# Altium PCB PCB_CrossedHammerDesign.PcbDoc
Units mil, origin at the board's own origin, x right, y up, seen from the top; angles counter-clockwise.
Board outline 4843.33 x 4828.47 mil, 2 copper layers (Top Layer, Bottom Layer); 71 components, 83 nets, 284 pads, 93 vias.
Unrouted connection lines stored in the file: 7.
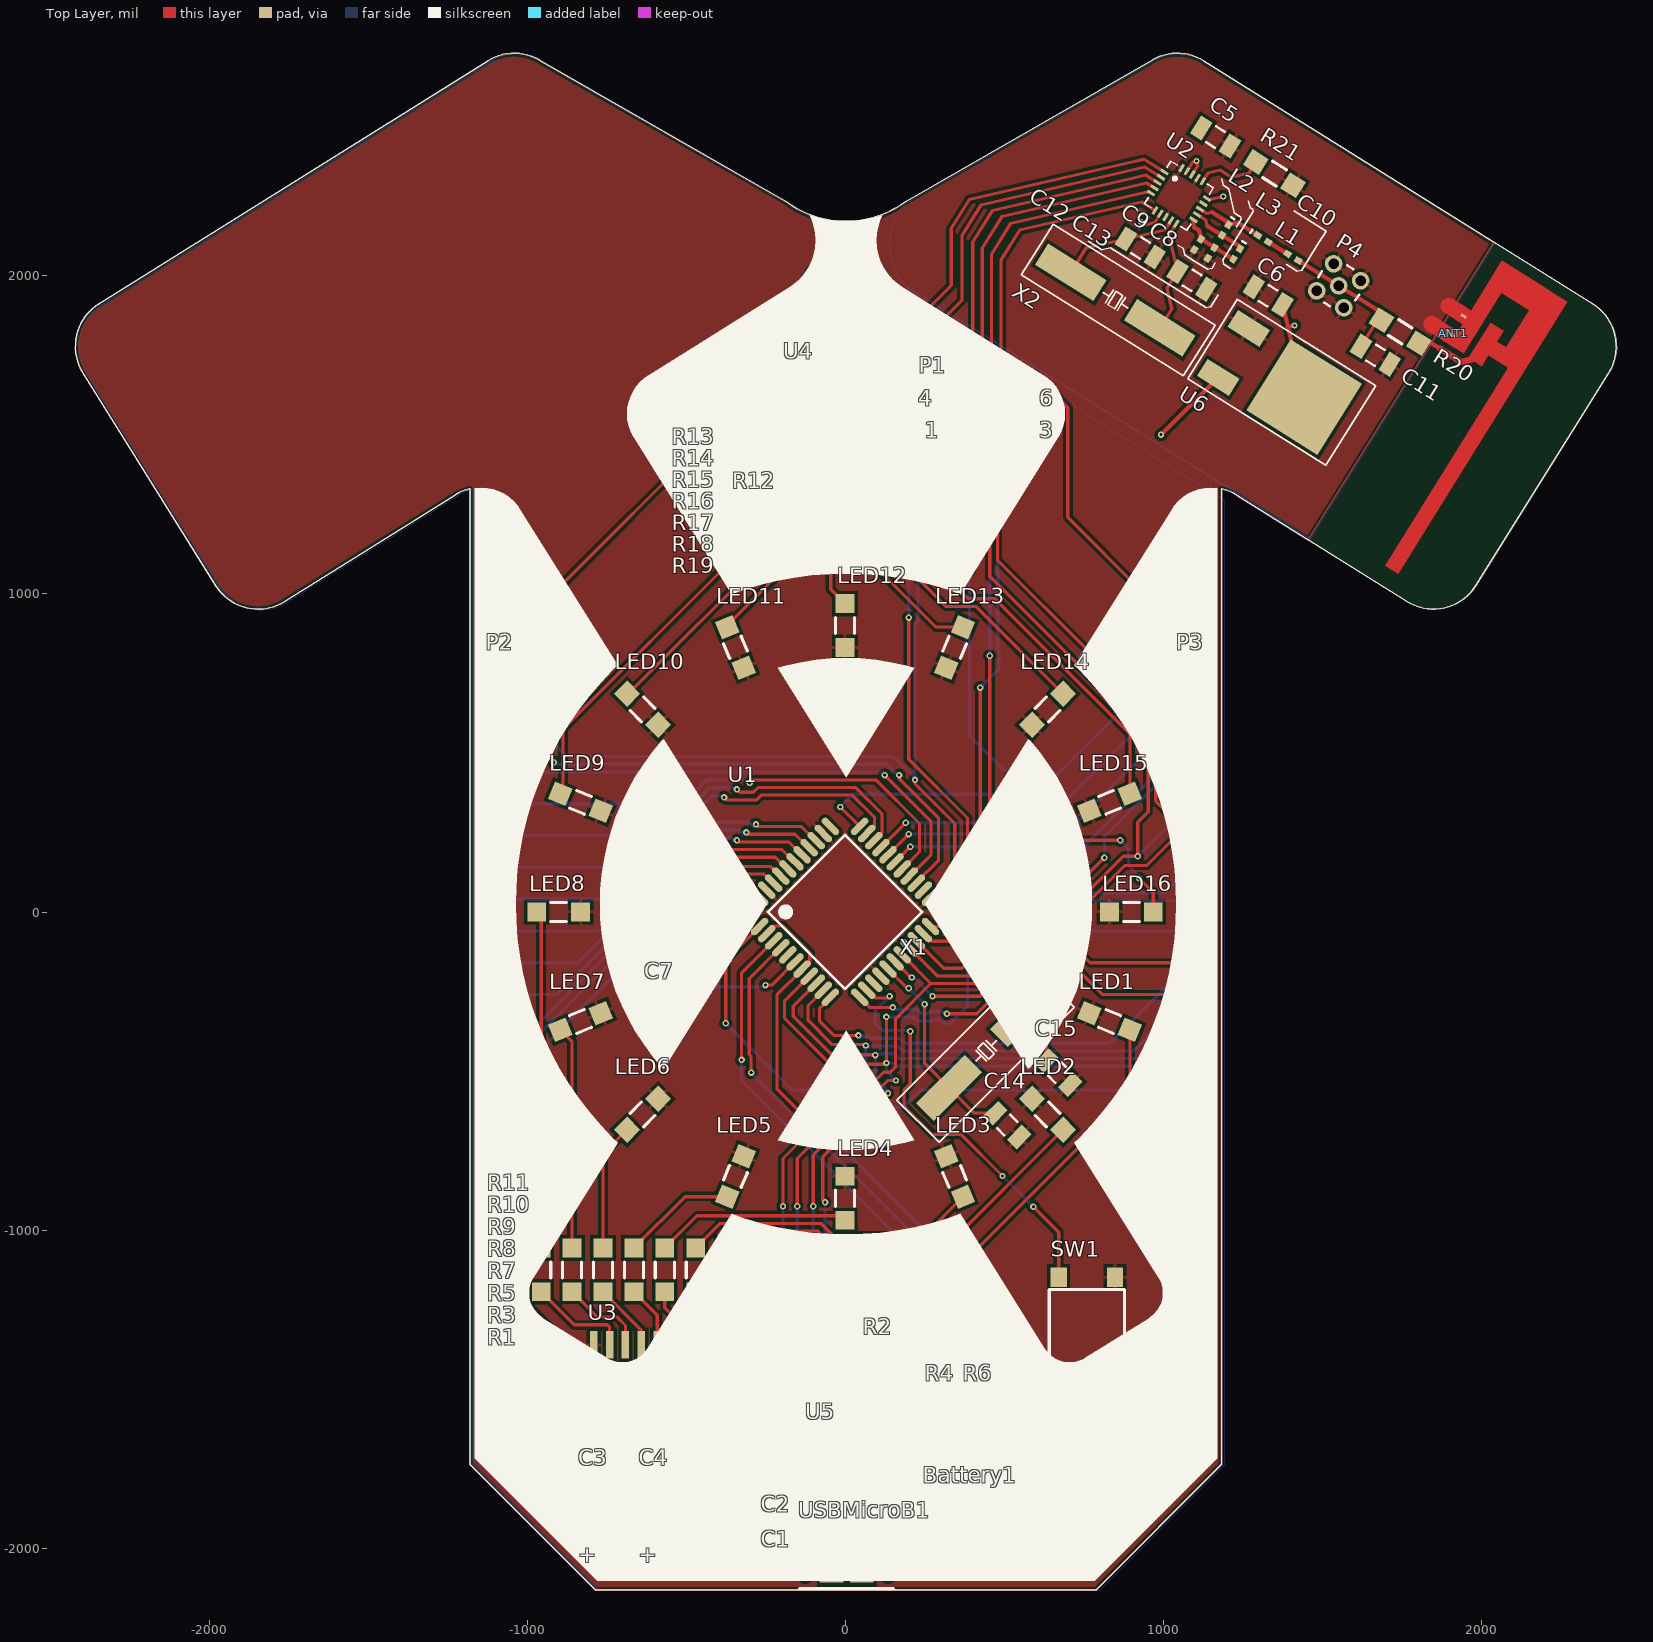
[diagram p0: Top Layer view]
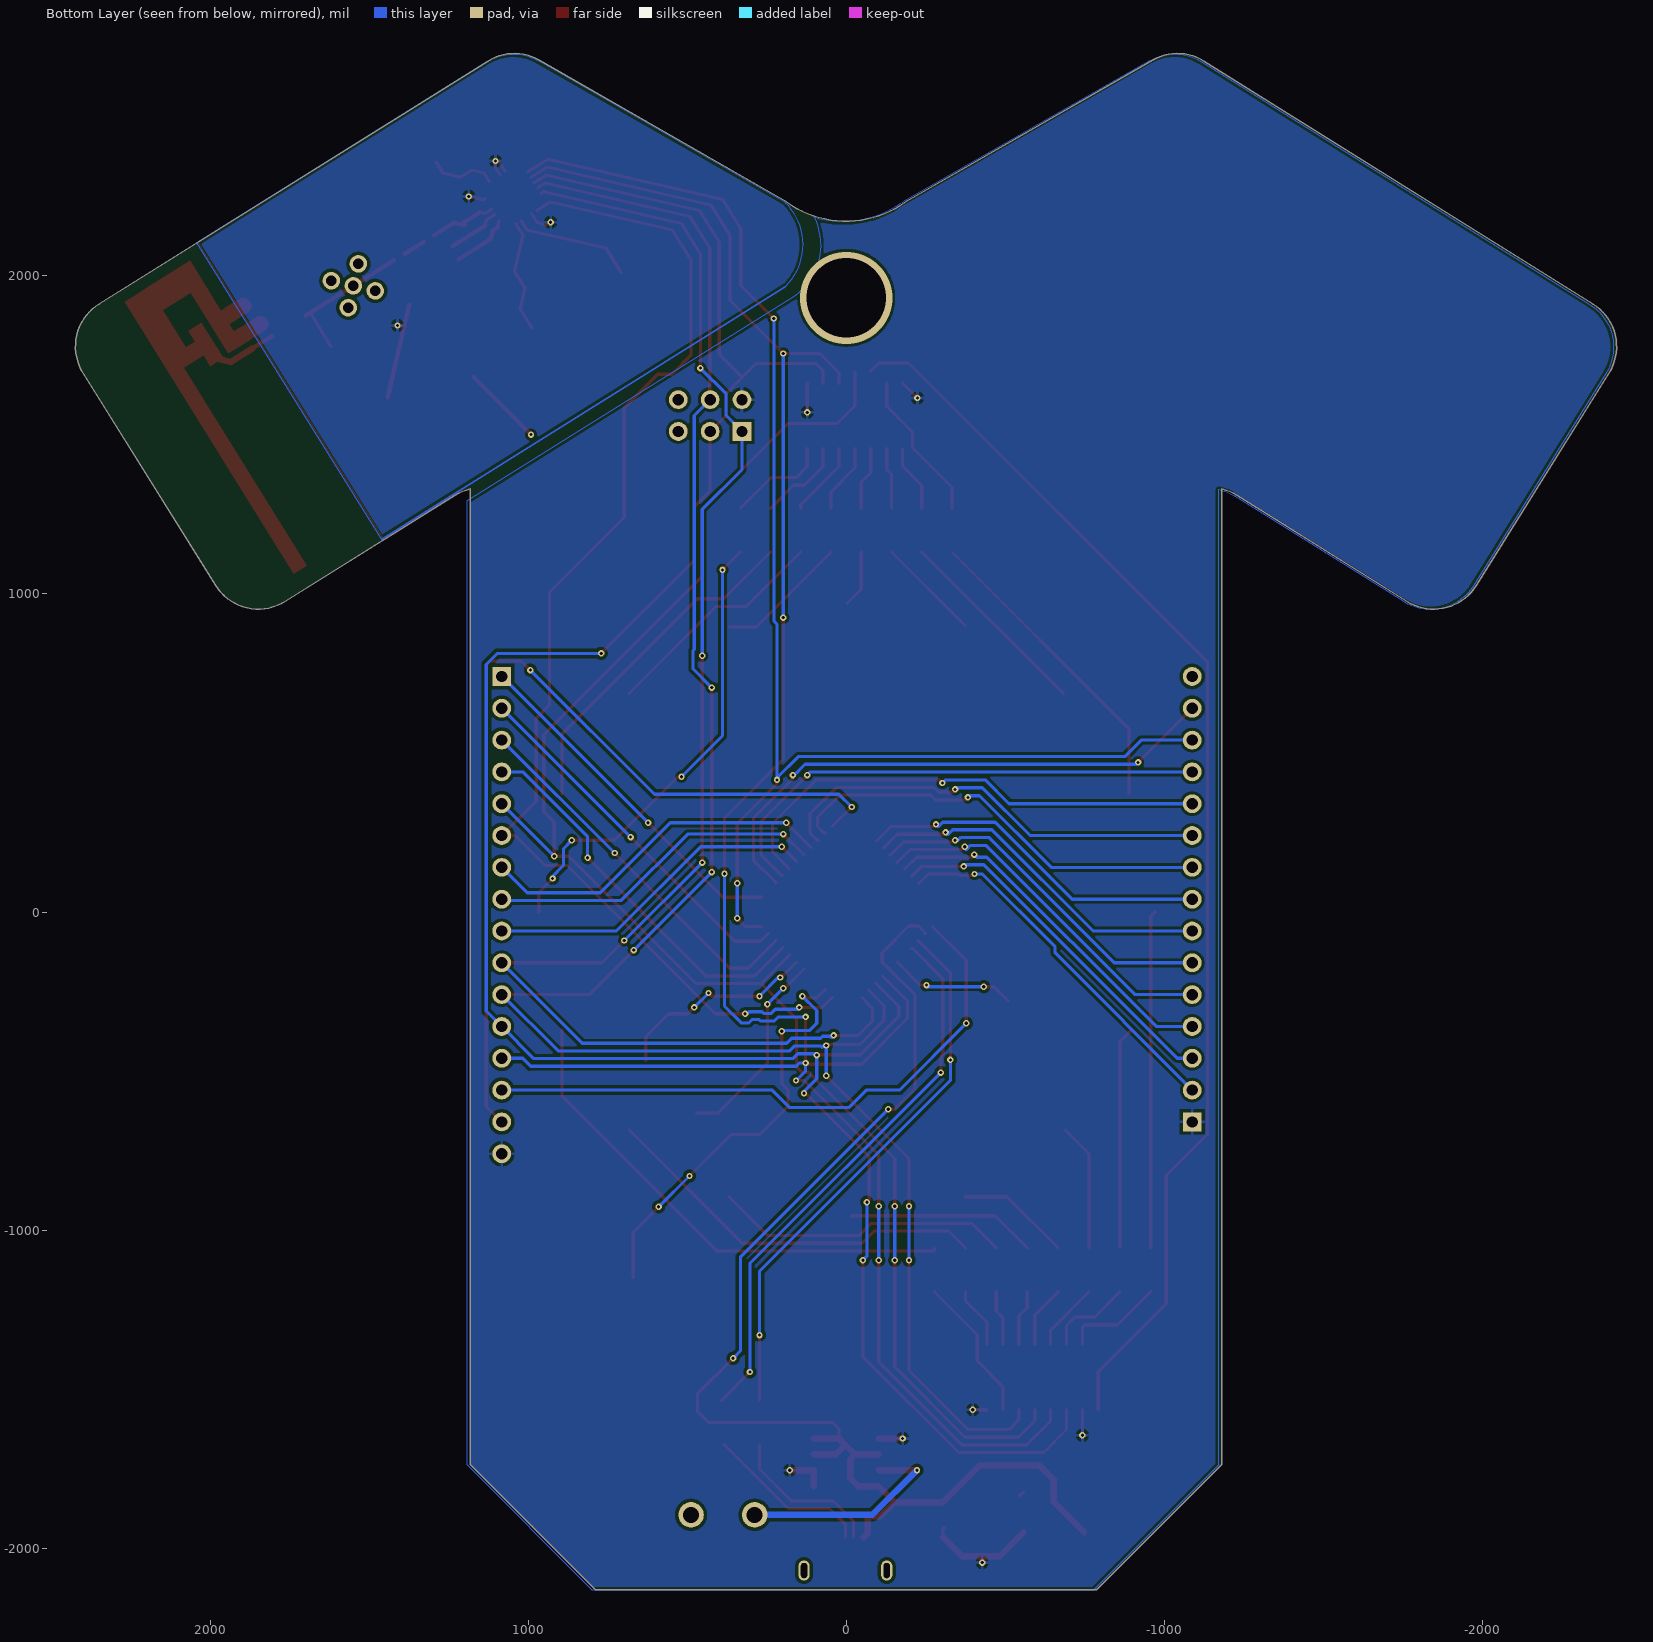
[diagram p1: Bottom Layer view, seen from below]

## Layer stack, top to bottom
Top Solder: solder mask 0.4, Solder Resist, Dk 3.5
Top Layer: signal copper 1.4
Dielectric 1: dielectric 12.6, FR-4, Dk 4.8
Bottom Layer: signal copper 1.4
Bottom Solder: solder mask 0.4, Solder Resist, Dk 3.5

## Board outline
-1978.56,1026.39 ccw(c-1845.01,1109.84) -1761.56,976.29 -1227.35,1310.09 cw(c-1143.9,1176.54) -1179.09,1330.04 -1179.09,-1736.05 -785.39,-2129.75 789.41,-2129.75 1183.11,-1736.05 1183.11,1330.04 cw(c1147.92,1176.54) 1231.37,1310.09 1765.58,976.29 ccw(c1849.03,1109.84) 1982.58,1026.39 2399.84,1694.14 ccw(c2266.29,1777.59) 2349.74,1911.14 1127.58,2674.83 ccw(c1044.13,2541.28) 965.81,2677.91 190.83,2233.69 cw(c2.01,2488.89) -186.81,2233.69 -961.8,2677.91 ccw(c-1040.11,2541.28) -1123.56,2674.83 -2345.72,1911.14 ccw(c-2262.27,1777.59) -2395.82,1694.14

## Design rules (kind name [scope] priority, off if disabled: settings)
Clearance [All] p1: gap=10
Clearance Clearance_Silk [(IsFill AND OnLayer('Top Overlay')) vs IsPad] p2: gap=10
PolygonConnect [All] p1: connectstyle=Relief reliefconductorwidth=10 reliefentries=4 polygonreliefangle="90 Angle" airgapwidth=10
RoomDefinition MainBoard [InComponentClass('MainBoard')] p1: confinementstyle=ConfineIn formatcopy=TRUE lockcomponents=FALSE outline 4130,-3385 8860,-3385 8860,-1665 4130,-1665
RoutingVias [All] p1: holewidth=10 width=20 viastyle="Through Hole" minholewidth=10 minwidth=20 maxholewidth=10 maxwidth=20
SolderMaskExpansion [All] p1: expansion=4
UnpouredPolygon [All] p1: allowunpoured=FALSE
Width [All] p1: maxlimit=59.06 minlimit=10 preferedwidth=10
29 further rules are at their usual default settings.

## Components (designator, comment, footprint, x,y, rotation, side; value= is the part's Value field where it differs from the comment)
ANT1 "INV_F_ANTENNA" INV_F_PCB_ANTENNA 2065.31,2052.29 r238 top
Battery1 "PowerPins" PowerPins_PCB 388.97,-1894.19 r0 top
C1 "Cap Semi" C1206 -356.03,-1964.19 r0 top
C2 "Cap Semi" C1206 -356.03,-1854.19 r0 top
C3 "Electrolytic Capacitor" sheityCapPackage -746.03,-1934.19 r0 top
C4 "Electrolytic Capacitor" sheityCapPackage -556.03,-1934.19 r0 top
C5 "Cap Semi" C1206 1163.7,2436.13 r148 top
C6 "Cap Semi" C1206 1328.48,1937.24 r328 top
C7 "Cap Semi" C1206 -561.03,-279.19 r180 top
C8 "Cap Semi" 0402 1149.25,2071.84 r58 top
C9 "Cap Semi" 0402 1106.85,2098.33 r58 top
C10 "Cap Semi" 0402 1406.3,2058.61 r148 top
C11 "Cap Semi" C1206 1665.58,1750.18 r328 top
C12 "Cap Semi" C1206 927.26,2087.73 r148 top
C13 "Cap Semi" C1206 1088.97,1985.81 r148 top
C14 "Cap Semi" C1206 508.97,-669.19 r315 top
C15 "Cap Semi" C1206 668.97,-504.19 r315 top
L1 "Inductor" 0402-A 1313.01,2116.9 r328 top
L2 "Inductor" 0402-A 1194.29,2143.92 r238 top
L3 "Inductor" 0402-A 1229.81,2068.66 r238 top
LED1 "LED_Green_1206Package" 1206Package_PCB 830.46,-343.61 r157.5 top
LED2 "LED_Green_1206Package" 1206Package_PCB 635.37,-635.59 r135 top
LED3 "LED_Green_1206Package" 1206Package_PCB 343.39,-830.68 r112.5 top
LED4 "LED_Green_1206Package" 1206Package_PCB -1.03,-899.19 r90 top
LED5 "LED_Green_1206Package" 1206Package_PCB -345.44,-830.68 r67.5 top
LED6 "LED_Green_1206Package" 1206Package_PCB -637.42,-635.59 r45 top
LED7 "LED_Green_1206Package" 1206Package_PCB -832.52,-343.61 r22.5 top
LED8 "LED_Green_1206Package" 1206Package_PCB -901.03,0.81 r0 top
LED9 "LED_Green_1206Package" 1206Package_PCB -832.52,345.22 r337.5 top
LED10 "LED_Green_1206Package" 1206Package_PCB -637.42,637.21 r315 top
LED11 "LED_Green_1206Package" 1206Package_PCB -345.44,832.3 r292.5 top
LED12 "LED_Green_1206Package" 1206Package_PCB -1.03,900.81 r270 top
LED13 "LED_Green_1206Package" 1206Package_PCB 343.39,832.3 r247.5 top
LED14 "LED_Green_1206Package" 1206Package_PCB 635.37,637.21 r225 top
LED15 "LED_Green_1206Package" 1206Package_PCB 830.46,345.22 r202.5 top
LED16 "LED_Green_1206Package" 1206Package_PCB 898.97,0.81 r180 top
P1 "Header 3X2A" HDR2X3_CEN 328.97,1510.81 r0 top
P2 "Header 15" HDR1X15 -1086.03,-659.19 r90 top
P3 "Header 16" HDR1X16 1083.97,740.81 r270 top
P4 "COAX-M" MMCX2.54-V5 1550.47,1968.52 r328 top
R1 "Resistor_1206Package" 1206Package_PCB -276.03,-1124.19 r90 top
R2 "Resistor_1206Package" 1206Package_PCB 78.97,-1459.19 r270 top
R3 "Resistor_1206Package" 1206Package_PCB -373.17,-1124.19 r90 top
R4 "Resistor_1206Package" 1206Package_PCB 273.97,-1604.19 r270 top
R5 "Resistor_1206Package" 1206Package_PCB -470.31,-1124.19 r90 top
R6 "Resistor_1206Package" 1206Package_PCB 393.97,-1604.19 r270 top
R7 "Resistor_1206Package" 1206Package_PCB -567.46,-1124.19 r90 top
R8 "Resistor_1206Package" 1206Package_PCB -664.6,-1124.19 r90 top
R9 "Resistor_1206Package" 1206Package_PCB -761.74,-1124.19 r90 top
R10 "Resistor_1206Package" 1206Package_PCB -858.89,-1124.19 r90 top
R11 "Resistor_1206Package" 1206Package_PCB -956.03,-1124.19 r90 top
R12 "Resistor_1206Package" 1206Package_PCB -331.03,1200.81 r270 top
R13 "Resistor_1206Package" 1206Package_PCB -236.03,1200.81 r270 top
R14 "Resistor_1206Package" 1206Package_PCB -141.03,1200.81 r270 top
R15 "Resistor_1206Package" 1206Package_PCB -46.03,1200.81 r270 top
R16 "Resistor_1206Package" 1206Package_PCB 48.97,1200.81 r270 top
R17 "Resistor_1206Package" 1206Package_PCB 143.97,1200.81 r270 top
R18 "Resistor_1206Package" 1206Package_PCB 238.97,1200.81 r270 top
R19 "Resistor_1206Package" 1206Package_PCB 333.97,1200.81 r270 top
R20 "Resistor_1206Package" 1206Package_PCB 1743.51,1824.15 r328 top
R21 "Resistor_1206Package" 1206Package_PCB 1348.7,2321.13 r328 top
SW1 "PushButton" TactileSwitchPCB 758.97,-1304.19 r90 top
U1 "ATmega32U4-AU" 44ML_N -1.03,0.81 r45 top
U2 "nRF24L01+" 20-VFQFN 973.28,2205.38 r328 top
U3 "8BitShiftReg" 16-SOIC -441.03,-1359.19 r270 top
U4 "8BitShiftReg" 16-SOIC -176.03,1457.5 r90 top
U5 "DualNP-ChFET" 8-SOIC -101.03,-1804.19 r0 top
U6 "LD1117DT33TR" DPAK 1267.89,1834.26 r238 top
USBMicroB1 "Micro USB Receptacle Type B" USBMicroB_PCB 3.97,-2069.19 r0 top
X1 "HC-49S" HC-49S 558.97,-319.19 r225 top
X2 "HC-49S" HC-49S 708.97,2010.81 r328 top

## Footprints (in the part's own frame and the unit in brackets; to place one, negate y for a bottom-side part, rotate by r counter-clockwise, add the part's x,y. Pads: shape width x height; smd on the part's side, far side on the other; paste and mask are expansions set on the pad)
8-SOIC [mm]
  rect 2.2x0.6 smd: 1(0,3.81) 2(0,2.54) 3(0,1.27) 4(0,0) 5(5.2,0) 6(5.2,1.27) 7(5.2,2.54) 8(5.2,3.81)
  silkscreen extent 1.4,-0.63 3.81,4.45
16-SOIC [mm]
  rect 2.2x0.6 smd: 1(0,0) 2(0,-1.27) 3(0,-2.54) 4(0,-3.81) 5(0,-5.08) 6(0,-6.35) 7(0,-7.62) 8(0,-8.89) 9(5.2,-8.89) 10(5.2,-7.62) 11(5.2,-6.35) 12(5.2,-5.08) 13(5.2,-3.81) 14(5.2,-2.54) 15(5.2,-1.27) 16(5.2,0)
  silkscreen extent 1.94,-9.53 3.27,0.64
20-VFQFN [mm] "The package"
  rect 0.7x0.25 smd: 1(-1,3) 2(-1,2.5) 3(-1,2) 4(-1,1.5) 5(-1,1) 11(3,1) 12(3,1.5) 13(3,2) 14(3,2.5) 15(3,3)
  rect 0.25x0.7 smd: 6(0,0) 7(0.5,0) 8(1,0) 9(1.5,0) 10(2,0) 16(2,4) 17(1.5,4) 18(1,4) 19(0.5,4) 20(0,4)
  silkscreen extent -1,0 3,4
44ML_N [mm] "Thin QFP, 44-Leads, Body 10x10mm, Pitch 0.8mm, IPC Medium Density"
  oval 1.75x0.55 smd: 1(-5.65,4) 2(-5.65,3.2) 3(-5.65,2.4) 4(-5.65,1.6) 5(-5.65,0.8) 6(-5.65,0) 7(-5.65,-0.8) 8(-5.65,-1.6) 9(-5.65,-2.4) 10(-5.65,-3.2) 11(-5.65,-4) 23(5.65,-4) 24(5.65,-3.2) 25(5.65,-2.4) 26(5.65,-1.6) 27(5.65,-0.8) 28(5.65,0) 29(5.65,0.8) 30(5.65,1.6) 31(5.65,2.4) 32(5.65,3.2) 33(5.65,4)
  oval 0.55x1.75 smd: 12(-4,-5.65) 13(-3.2,-5.65) 14(-2.4,-5.65) 15(-1.6,-5.65) 16(-0.8,-5.65) 17(0,-5.65) 18(0.8,-5.65) 19(1.6,-5.65) 20(2.4,-5.65) 21(3.2,-5.65) 22(4,-5.65) 34(4,5.65) 35(3.2,5.65) 36(2.4,5.65) 37(1.6,5.65) 38(0.8,5.65) 39(0,5.65) 40(-0.8,5.65) 41(-1.6,5.65) 42(-2.4,5.65) 43(-3.2,5.65) 44(-4,5.65)
  silkscreen extent -5.77,-4.35 4.35,4.95, body extent -5,-5 5,5, height 1.2
0402 [mm] "Chip Capacitor, Body 1.0x0.5mm, IPC High Density"
  rect 0.6x0.5 smd: 1(-0.5,0) 2(0.5,0)
  body extent -0.55,-0.3 0.55,0.3, height 1.3
0402-A [mm] "Chip Inductor, Body 1.0x0.5mm, IPC High Density"
  rect 0.6x0.5 smd: 1(-0.5,0) 2(0.5,0)
  silkscreen extent -1.1,-0.15 -1.1,0.15, body extent -0.55,-0.3 0.55,0.3, height 0.55
1206Package_PCB [mm]
  rect 1.5x1.5 smd: 1(-1.75,0) 2(1.75,0)
  silkscreen extent -0.64,-0.76 0.64,0.76
C1206 [mm] "Chip Capacitor, Body 3.2x1.6mm, IPC High Density"
  rect 1.1x1.7 smd: 1(-1.35,0) 2(1.35,0)
  silkscreen extent -0.4,-0.75 0.4,0.75, body extent -1.7,-0.9 1.7,0.9, height 1.3
DPAK [mm]
  rect 1.6x3 smd: 1(0,0) 3(4.6,0)
  rect 6.7x6.7 smd: 2(2.3,6.65)
  silkscreen extent -1.5,-2 6,11
HC-49S [mm]
  rect 5.5x2 smd: 1(0,0) 2(8.375,0)
  silkscreen extent -3.25,-2.25 12,2.5
HDR1X15 [mm] "Connector; Header; 15 Position"
  rect 1.5x1.5 hole 0.9: 1(0,0)
  round 1.5 hole 0.9: 2(2.54,0) 3(5.08,0) 4(7.62,0) 5(10.16,0) 6(12.7,0) 7(15.24,0) 8(17.78,0) 9(20.32,0) 10(22.86,0) 11(25.4,0) 12(27.94,0) 13(30.48,0) 14(33.02,0) 15(35.56,0)
  silkscreen extent 36.83,-1.27 36.83,1.27
HDR1X16 [mm] "Connector; Header; 16 Position"
  rect 1.5x1.5 hole 0.9: 1(0,0)
  round 1.5 hole 0.9: 2(2.54,0) 3(5.08,0) 4(7.62,0) 5(10.16,0) 6(12.7,0) 7(15.24,0) 8(17.78,0) 9(20.32,0) 10(22.86,0) 11(25.4,0) 12(27.94,0) 13(30.48,0) 14(33.02,0) 15(35.56,0) 16(38.1,0)
  silkscreen extent -1.27,-1.27 39.37,1.27
HDR2X3_CEN [mm] "Connector; Header; 3x2 Position"
  rect 1.5x1.5 hole 0.9: 1(0,0)
  round 1.5 hole 0.9: 2(2.54,0) 3(5.08,0) 4(0,2.54) 5(2.54,2.54) 6(5.08,2.54)
  silkscreen extent -1.27,-1.27 6.35,3.81
INV_F_PCB_ANTENNA [mm]
  rect 0.2x0.5 smd: 1(5.5,-0.2) 2(7.25,-0.2) 3(8.696,-0.2)
  Top Layer region: 0.127,0.043 0.127,0.04 0.129,0.038 0.131,0.037 0.133,0.036 0.133,0.036 4.81,0.047 4.81,-0.598 4.811,-0.6 4.812,-0.602 4.814,-0.604 4.817,-0.604 4.817,-0.604 6.077,-0.601 6.081,-0.6 6.083,-0.598 6.084,-0.595 6.084,-0.595 6.084,0.05 6.775,0.052 6.775,-0.593 6.776,-0.596 6.777,-0.598 6.779,-0.599 6.782,-0.6 6.782,-0.6 8.016,-0.597 8.02,-0.596 8.022,-0.593 8.023,-0.59 8.023,-0.59 8.023,-0.033 8.023,1.343 8.022,1.346 8.021,1.348 8.019,1.35 8.016,1.35 8.016,1.35 2.32,1.337 2.32,3.977 5.81,3.985 5.81,3.109 4.817,3.107 4.814,3.106 4.811,3.103 4.81,3.1 4.81,3.1 4.81,1.897 4.811,1.895 4.812,1.893 4.814,1.891 4.817,1.891 4.817,1.891 8.014,1.898 8.459,1.456 8.459,-0.589 8.46,-0.592 8.461,-0.594 8.463,-0.595 8.466,-0.596 8.466,-0.596 8.926,-0.595 8.929,-0.594 8.932,-0.591 8.933,-0.588 8.933,-0.588 8.933,1.649 8.932,1.652 8.931,1.654 8.931,1.654 8.931,1.654 8.931,1.654 8.931,1.654 8.931,1.654 8.931,1.654 8.118,2.46 8.118,3.108 8.118,3.11 8.116,3.112 8.114,3.114 8.112,3.114 8.112,3.114 7.119,3.112 7.119,3.995 7.119,4.982 25.708,5.026 25.711,5.027 25.713,5.029 25.714,5.032 25.714,5.032 25.714,6.235 25.714,6.238 25.712,6.24 25.71,6.241 25.708,6.242 25.708,6.242 0.134,6.182 0.13,6.181 0.128,6.179 0.127,6.176 0.127,6.176 0.127,4.973 0.127,3.979 0.127,1.325
MMCX2.54-V5 [mm] "Connector; RF Coaxial, MMCX, Thru-Hole; 5 Position; Vertical"
  round 1.4 hole 0.85: 1(0,0) 2(-1.27,-1.27) 3(1.27,-1.27) 4(1.27,1.27) 5(-1.27,1.27)
  silkscreen extent -1.75,-1.75 1.75,1.75
PowerPins_PCB [mil]
  round 80 hole 50: 1(-100,0) 2(100,0)
  silkscreen extent -150,-50 150,50
sheityCapPackage [mm] "This is jank"
  rect 1.3x2.5 smd: 1(0,-0.375) 2(0,2.875)
TactileSwitchPCB [mm]
  rect 1.55x1.3 smd: 1(-3.975,2.25) 2(3.975,2.25) 3(-3.975,-2.25) 4(3.975,-2.25)
  silkscreen extent -3,-3 3,3
USBMicroB_PCB [mm]
  rect 0.4x1.35 smd: 1(-1.3,2.667) 2(-0.65,2.667) 3(0,2.675) 4(0.65,2.667) 5(1.3,2.667)
  oval 0.9x1.6 hole 0.5 slot 1.2 at 90 deg: CASE(-3.3,0) CASE(3.3,0)
  rect 1.6x1.4 smd: CASE(-3.2,2.45) CASE(3.2,2.45)
  rect 1.9x1.9 smd: CASE(-1.2,0) CASE(1.2,0)
  silkscreen extent -3.75,-1.45 3.75,-1.45

## Part data
ANT1: library part INV_V_ANTENNA
C1 C2 C5 C6 C7 C8 C9 C10 C11 C12 C13 C14 C15: "Capacitor (Semiconductor SIM Model)"
C3 C4: "asdf"
LED1 LED2 LED3 LED4 LED5 LED6 LED7 LED8 LED9 LED10 LED11 LED12 LED13 LED14 LED15 LED16: "Green LED"
P1: "Header, 3-Pin, Dual row"
P2: "Header, 15-Pin"
P3: "Header, 16-Pin"
P4: "RF Coaxial PCB Connector, MMCX; Thru-Hole, Vertical Mount Plug,  50 Ohm Impedance"
R1 R2 R3 R4 R5 R6 R7 R8 R9 R10 R11 R12 R13 R14 R15 R16 R17 R18 R19 R20 R21: "Resistor 1206"
SW1: library part TactileButton, "Normally open push button."
U1: "8-bit AVR Microcontroller, 2.7-5.5V, 32KB Flash, 2.5KB EEPROM, 1KB SRAM, USB Controller, 44-pin TQFP, Industrial Grade (-40°C to 85°C)"
U2: "2.4GHz RF Transceiver"
U3 U4: library part 8BitShiftRegister
U5: library part "Dual N & P-Channel MOSFET"
USBMicroB1: library part USBMicroB

## Free pads (board coordinates)
  rect 7.87x19.68 smd: 0(48.97,1300)

## Via types
v1: diameter 20, hole 10, Top Layer to Bottom Layer, 92 vias
v2: diameter 289.37, hole 250, Top Layer to Bottom Layer, 1 vias

## Nets (pads, with @x,y where several pads share a name; then routed paths per layer and width w, separated by ;. In a path a pad name is that pad's centre, name@x,y a point inside that pad or via, vN(x,y) a via of type N, cw(c..) or ccw(c..) an arc to the next point about the centre after c; other vN are vias at no path point)
3V3: C6.2 U2.7 U2.15 U2.18 U2.19 U6.2 | length 544.8
  Top Layer w10: v1(930.43,2168.29) 943.15,2160.34 972.59,2167.13 U2.7 ; U2.19 1091.82,2357.94 v1(1103.72,2360.69) 1107.24,2345.47 U2.18 ; U2.15 1142.38,2238.99 v1(1187.47,2249.4)
  Top Layer w14: C6.2@1375.12,1908.1 1391.03,1839.2 ; v1(1411.7,1843.97) 1391.03,1839.2 ; U6.2 1391.03,1839.2
ANT1: L2.2 L3.1 U2.12 | length 172
  Top Layer w10: U2.12 1132.58,2175.47 1136.95,2156.54
  Top Layer w14: 1136.95,2156.54 L2.2 L3.1@1238.45,2093.12
ANT2: L1.1 L2.1 U2.13 | length 213.4
  Top Layer w10: U2.13 1136.9,2195.98 1152.42,2199.57 ; L2.1@1196.53,2158.72 L2.1
  Top Layer w14: 1152.42,2199.57 L2.1@1203.03,2167.94 ; L2.1 1232.72,2167.08 L1.1
BATT: Battery1.1 U5.3 | length 688
  Top Layer w20: v1(-221.03,-1754.19) U5.3
  Bottom Layer w20: v1(-221.03,-1754.19) -81.03,-1894.19 Battery1.1
D+: R6.1 U1.4 | length 1753.1
  Top Layer w10: v1(-296.03,-504.19) -297.03,-503.19 -297.03,-452.18 -302.03,-447.18 -302.03,-208.75 -207.58,-114.3 U1.4@-202.86,-114.3 ; v1(303.97,-1445.25) R6.1@393.97,-1535.25
  Bottom Layer w10: v1(-296.03,-504.19) 303.97,-1104.19 v1(303.97,-1445.25)
D-: R4.1 U1.3 | length 1735.9
  Top Layer w10: v1(-326.03,-464.19) -326.03,-190.56 U1.3 ; R4.1 v1(273.97,-1329.19)
  Bottom Layer w10: v1(-326.03,-464.19) -326.03,-529.19 273.97,-1129.19 v1(273.97,-1329.19)
GND: ANT1.1 ANT1.2 Battery1.2 C1.1 C2.1 C3.2 C4.2 C5.1 C6.1 C7.2 C8.1 C9.1 C11.2 C12.1 C13.1 C14.2 C15.2 LED1.2 LED2.2 LED3.2 LED4.2 LED5.2 LED6.2 LED7.2 LED8.2 LED9.2 LED10.2 LED11.2 LED12.2 LED13.2 LED14.2 LED15.2 LED16.2 P1.6 P2.15 P3.1 P4.2 P4.3 P4.4 P4.5 R2.1 R21.2 SW1.3 SW1.4 U1.5 U1.15 U1.23 U1.35 U1.43 U2.8 U2.14 U2.17 U2.20 U3.8 U4.8 U6.1 USBMicroB1.5 | length 1231.1
  Top Layer w10: C4.2 C4.2@-542.84,-1834.19 ; U1.23 389.91,46.74 v1(623.97,280.81)
  Top Layer w51.18: 1841.91,1848.26 1893.29,1816.16 ; 1896.75,1904.79 ANT1.1@1937.49,1879.34
  Bottom Layer w10: v1(623.97,280.81) P3.1
MISO: P1.1 P3.10 U1.11 U2.5 | length 4736.8
  Top Layer w10: U1.11 -81.03,-301.9 -81.03,-342.37 -36.21,-387.19 v1(40.97,-387.19) ; v1(453.97,155.81) v1(453.97,805.81) ; v1(459.79,1709.99) 459.79,2068.85 519.3,2164.08 913.99,2255.2 953.31,2264.28 U2.5 ; v1(698.97,-89.19) 768.97,-159.19 P3.10
  Bottom Layer w10: v1(40.97,-387.19) 47.97,-394.18 51.96,-390.19 75.98,-390.19 81.98,-396.19 172.79,-396.19 188.79,-412.19 830.97,-412.19 P3.10 ; v1(453.97,155.81) v1(698.97,-89.19) ; v1(453.97,805.81) 453.97,1265.81 328.97,1390.81 P1.1 378.97,1560.81 378.97,1629.44 459.52,1709.99 v1(459.79,1709.99)
MOSI: P1.5 P3.11 U1.10 U2.4 U3.14 | length 6471
  Top Layer w10: U3.14 -541.03,-1595.9 -510.71,-1626.22 -382.05,-1626.22 -196.03,-1440.2 v1(-196.03,-1094.19) ; v1(-196.03,-924.19) -196.03,-774.19 v1(63.97,-514.19) ; U1.10 -117.09,-293.42 -117.09,-340.25 -41.15,-416.19 60.97,-416.19 v1(63.97,-419.19) ; v1(423.97,125.81) v1(423.97,705.81) ; P1.5 430.11,1611.95 430.11,2087.4 492.27,2186.87 907.63,2282.76 946.52,2291.74 U2.4 ; v1(668.97,-119.19) 808.97,-259.19 P3.11
  Bottom Layer w10: v1(-196.03,-1094.19) v1(-196.03,-924.19) ; v1(63.97,-514.19) v1(63.97,-419.19) 62.97,-420.19 72.04,-420.19 77,-425.15 81.96,-420.19 162.85,-420.19 178.85,-436.19 906.97,-436.19 P3.11 ; v1(423.97,125.81) v1(668.97,-119.19) ; v1(423.97,705.81) 482.97,764.81 482.97,821.82 478.97,825.82 478.97,1560.81 P1.5
NetANT1_3: ANT1.3 R20.2 | length 74.4
  Top Layer w14.5: R20.2@1804.85,1810.25 1867.92,1770.84
NetC7_1: C7.1 U1.6 | length 403.3
  Top Layer w10: C7.1 -462.88,-234.19 v1(-431.03,-234.19) ; v1(-251.03,-229.19) -231.03,-229.19 U1.6
  Bottom Layer w10: v1(-431.03,-234.19) -251.03,-234.19 v1(-251.03,-229.19)
NetC10_1: C10.1 C11.1 P4.1 R20.1 | length 450.2
  Top Layer w10: C11.1 R20.1@1686.12,1883.36
  Top Layer w14: C10.1 P4.1 R20.1@1699.81,1875.2
NetC10_2: C10.2 L1.2 | length 70.6
  Top Layer w14: L1.2 C10.2
NetC12_2: C12.2 U2.9 X2.1 | length 379.7
  Top Layer w10: X2.1 756.5,2086.87 C12.2 1004.66,2144.17 U2.9
NetC13_2: C13.2 U2.10 X2.2 | length 358.5
  Top Layer w10: X2.2 1025.97,1895.9 1010.9,1961.17 C13.2 1017.72,2127.38 ; 1017.63,2127.77 U2.10
NetC14_1: C14.1 U1.16 X1.2 | length 634.1
  Top Layer w10: U1.16 194.43,-239.19 v1(198.97,-239.19) ; v1(248.97,-289.19) 248.97,-475.49 X1.2 405.09,-631.61 C14.1
  Bottom Layer w10: v1(198.97,-239.19) v1(248.97,-289.19)
NetC15_1: C15.1 U1.17 X1.1 | length 655.8
  Top Layer w10: U1.17 204.97,-205.19 v1(208.5,-205.19) ; v1(273.97,-264.19) 423.97,-264.19 v1(433.97,-254.19) ; v1(478.97,-299.19) 498.97,-319.19 X1.1 631.39,-391.61 C15.1
  Bottom Layer w10: v1(208.5,-205.19) 214.97,-205.19 v1(273.97,-264.19) ; v1(433.97,-254.19) v1(478.97,-299.19)
NetLED1_1: LED1.1 R1.2 | length 1589.7
  Top Layer w10: R1.2 -276.03,-1064.62 408.55,-1064.62 894.12,-579.05 LED1.1
NetLED2_1: LED2.1 R3.2 | length 1242.8
  Top Layer w10: R3.2 -320.07,-1002.19 -86.79,-1002.19 -48.37,-1040.62 327.77,-1040.62 LED2.1
NetLED3_1: LED3.1 R5.2 | length 938.6
  Top Layer w10: R5.2 -393.21,-978.19 -76.85,-978.19 -38.43,-1016.62 247.47,-1016.62 LED3.1
NetLED4_1: LED4.1 R7.2 | length 594.4
  Top Layer w10: R7.2 -466.36,-954.19 LED4.1@-14.93,-954.19
NetLED5_1: LED5.1 R8.2 | length 359.5
  Top Layer w10: R8.2 -503.64,-894.34 LED5.1
NetLED6_1: LED6.1 R9.2 | length 402.3
  Top Layer w10: R9.2 -761.74,-759.9 LED6.1
NetLED7_1: LED7.1 R10.2 | length 700.8
  Top Layer w10: LED7.1 -858.89,-407.26 R10.2
NetLED8_1: LED8.1 R11.2 | length 1061.9
  Top Layer w10: LED8.1 -956.03,-13.09 R11.2
NetLED9_1: LED9.1 R12.2 | length 990.6
  Top Layer w10: LED9.1@-887.03,371.59 -887.03,575.91 R12.2
NetLED10_1: LED10.1 R13.2 | length 630.7
  Top Layer w10: LED10.1@-682.02,685.92 R13.2
NetLED11_1: LED11.1 R14.2 | length 326.4
  Top Layer w10: LED11.1@-371.81,901.13 R14.2
NetLED12_1: LED12.1 R15.2 | length 180.8
  Top Layer w10: R15.2 -46.03,1014.71 LED12.1
NetLED13_1: LED13.1 R16.2 | length 418.5
  Top Layer w10: R16.2 284.93,895.95 LED13.1
NetLED14_1: LED14.1 R17.2 | length 724.8
  Top Layer w10: R17.2 315.07,960.81 409.2,960.81 LED14.1
NetLED15_1: LED15.1 R18.2 | length 1080.8
  Top Layer w10: R18.2 386.07,984.81 469.97,984.81 894.12,560.66 LED15.1
NetLED16_1: LED16.1 R19.2 | length 1478.6
  Top Layer w10: R19.2 v1(390.07,1075.81) ; v1(518.97,425.81) 529.98,425.81 729.98,225.81 v1(863.97,225.81) ; v1(923.97,105.81) 967.87,61.91 LED16.1
  Bottom Layer w10: v1(390.07,1075.81) 390.07,554.71 v1(518.97,425.81) ; v1(863.97,225.81) 889.97,199.81 889.97,146.81 923.97,112.81 v1(923.97,105.81)
NetP2_2: P2.2 U1.42 | length 1169.2
  Top Layer w10: v1(-402.03,119.81) -397.03,114.81 -356.02,114.81 -351.02,119.81 -256.02,119.81 -227.49,91.29 U1.42
  Bottom Layer w10: P2.2 -655.03,-128.19 -655.03,-109.25 -425.97,119.81 v1(-402.03,119.81)
NetP2_3: P2.3 U1.41 | length 1150.6
  Top Layer w10: v1(-368.03,143.81) -235.47,143.81 -204.04,112.38 U1.41
  Bottom Layer w10: P2.3 -1038.91,-459.19 -430.91,148.81 -373.03,148.81 v1(-368.03,143.81)
NetP2_4: P2.4 U1.40 | length 1148.7
  Top Layer w10: v1(-401.03,180.81) -393.03,172.81 -219.93,172.81 -181.77,134.65 U1.40
  Bottom Layer w10: P2.4 -972.85,-359.19 -440.85,172.81 -409.03,172.81 v1(-401.03,180.81)
NetP2_5: P2.5 U1.39 | length 1155.2
  Top Layer w10: v1(-371.03,205.81) -362.03,196.81 -199.39,196.81 -159.5,156.92 U1.39
  Bottom Layer w10: P2.5 -906.79,-259.19 -437.79,209.81 -389.02,209.81 -375.52,196.32 -371.03,200.81 v1(-371.03,205.81)
NetP2_6: P2.6 U1.38 | length 1136.7
  Top Layer w10: v1(-341.03,225.81) -336.03,220.81 -178.85,220.81 -137.23,179.19 U1.38
  Bottom Layer w10: P2.6 -840.73,-159.19 -446.73,234.81 -359.02,234.81 -350.02,225.81 v1(-341.03,225.81)
NetP2_7: P2.7 U1.37 | length 1132.3
  Top Layer w10: v1(-311.03,250.81) -305.03,244.81 -158.31,244.81 U1.37@-114.96,201.46
  Bottom Layer w10: P2.7 -774.68,-59.19 -456.68,258.81 -333.02,258.81 -318.02,243.82 v1(-311.03,250.81)
NetP2_8: P2.8 U1.36 | length 1123.8
  Top Layer w10: v1(-281.03,275.81) -274.03,268.81 -137.76,268.81 U1.36@-92.68,223.73
  Bottom Layer w10: P2.8 -708.62,40.81 -466.62,282.81 -302.02,282.81 -288.02,268.82 v1(-281.03,275.81)
NetP2_9: P2.9 U1.32 | length 1372.7
  Top Layer w10: v1(-381.03,360.81) -373.03,352.81 -279.08,352.81 -264.08,367.81 22.14,367.81 91.44,298.51 91.44,269.08 71.9,249.55 U1.32@67.18,249.55
  Bottom Layer w10: P2.9 -642.56,140.81 -417.56,365.81 -386.03,365.81 v1(-381.03,360.81)
NetP2_10: P2.10 U1.31 | length 1403.7
  Top Layer w10: v1(-341.03,385.81) -332.03,376.81 -289.02,376.81 -274.02,391.81 32.08,391.81 ; 34.08,389.81 115.44,308.45 115.44,248.54 92.99,226.09 U1.31@88.27,226.09
  Bottom Layer w10: P2.10 -576.5,240.81 -426.5,390.81 -346.03,390.81 v1(-341.03,385.81)
NetP2_11: P2.11 U1.27 | length 1578.7
  Top Layer w10: v1(-301.03,405.81) -291.03,415.81 95.9,415.81 232.97,278.74 232.97,189.81 U1.27@180.17,137.01
  Bottom Layer w10: P2.11 -510.44,340.81 -435.44,415.81 -311.03,415.81 v1(-301.03,405.81)
NetP2_12: P2.12 U1.26 | length 1621.8
  Top Layer w10: v1(123.97,430.81) 268.97,285.81 268.97,179.36 204.34,114.74 U1.26@199.62,114.74
  Bottom Layer w10: P2.12 113.97,440.81 v1(123.97,430.81)
NetP2_14: P2.14 U1.25 | length 1761.8
  Top Layer w10: P2.14 v1(-916.03,470.81) ; v1(168.97,430.81) 168.97,419.75 292.97,295.75 292.97,163.54 223.07,93.65 U1.25
  Bottom Layer w10: v1(-916.03,470.81) -910.03,464.81 130.98,464.81 164.98,430.81 v1(168.97,430.81)
NetP3_2: P3.2 U1.21 | length 1152.1
  Top Layer w10: U1.21 247.71,-67.4 271.96,-91.65 351.51,-91.65 v1(678.97,235.81)
  Bottom Layer w10: v1(678.97,235.81) P3.2
NetP3_3: P3.3 U1.20 | length 1193.7
  Top Layer w10: U1.20 309.6,-176.19 366.97,-176.19 v1(728.97,185.81)
  Bottom Layer w10: v1(728.97,185.81) P3.3
NetP3_4: P3.4 U1.19 | length 1223.9
  Top Layer w10: U1.19 289.06,-200.19 442.97,-200.19 v1(813.97,170.81)
  Bottom Layer w10: v1(813.97,170.81) 813.97,236.87 1017.91,440.81 P3.4
NetP3_7: P3.7 U1.30 | length 1128.9
  Top Layer w10: U1.30 v1(189.89,280.81)
  Bottom Layer w10: v1(189.89,280.81) 553.97,280.81 773.97,60.81 1003.97,60.81 P3.7
NetP3_8: P3.8 U1.29 | length 1064.9
  Top Layer w10: U1.29 v1(198.97,245.35)
  Bottom Layer w10: v1(198.97,245.35) 499.43,245.35 707.97,36.81 1079.97,36.81 P3.8
NetP3_9: P3.9 U1.28 | length 1057.2
  Top Layer w10: U1.28 v1(203.97,205.81)
  Bottom Layer w10: v1(203.97,205.81) 458.97,205.81 723.97,-59.19 P3.9
NetR4_2: R4.2 USBMicroB1.2 | length 490.3
  Top Layer w10: USBMicroB1.2 -21.62,-1914.78 42.97,-1850.19 174.03,-1850.19 273.97,-1750.25 R4.2
NetR6_2: R6.2 USBMicroB1.3 | length 524.8
  Top Layer w10: USBMicroB1.3 3.97,-1924.19 53.97,-1874.19 183.97,-1874.19 R6.2@385.07,-1673.09
NetR21_1: R21.1 U2.16 | length 209.6
  Top Layer w10: U2.16 1139.87,2323.4 1177.72,2332.14 1213.44,2309.82 1268.31,2322.49 R21.1
NetU3_9: U3.9 U4.14 | length 3950.2
  Top Layer w10: U3.9 -791.03,-1444.01 -1004.56,-1230.49 -1004.56,-826.59 -1134.56,-696.59 -1134.56,785.69 -194.43,1725.81 -101.03,1725.81 U4.14@-76.03,1700.81
PB7: P3.6 U1.12 U2.6 | length 3936.8
  Top Layer w10: U1.12 76.26,-299.19 v1(148.97,-299.19) ; v1(318.97,-319.19) 412.91,-319.19 878.91,146.81 947.97,146.81 1041.97,240.81 P3.6 975.7,349.09 975.7,609.75 933.97,651.47 933.97,1005.81 698.97,1240.81 698.97,1585.81 593.97,1690.81 548.97,1690.81 489.47,1750.31 489.47,2050.3 547.76,2143.59 930.69,2231.99 941.46,2225.26 U2.6
  Bottom Layer w10: v1@148.97,-304.19 v1(148.97,-299.19) 154.97,-305.19 223.96,-305.19 236.96,-318.19 260.98,-318.19 265.98,-313.19 305.9,-313.19 311.9,-319.19 v1(318.97,-319.19)
PD0: P3.5 U1.18 U3.13 U4.13 | length 5186.4
  Top Layer w10: U3.13 -591.03,-1599.19 -540,-1650.22 -372.11,-1650.22 -151.03,-1429.14 v1(-151.03,-1094.19) ; v1(-151.03,-924.19) -151.03,-774.19 119.97,-503.19 140.98,-503.19 157.97,-486.2 157.97,-334.73 268.51,-224.19 ; U4.13@-26.03,1697.12 U4.13 -26.03,1590.81 28.97,1535.81 183.97,1535.81 453.97,1265.81 453.97,1055.81 951.7,558.09 951.7,315.02 918.97,282.29 v1(918.97,175.81) 873.97,175.81 473.97,-224.19 268.51,-224.19 ; U1.18 268.51,-224.19
  Bottom Layer w10: v1(-151.03,-1094.19) v1(-151.03,-924.19) ; v1(918.97,175.81) P3.5
PD5: P2.13 U1.22 U2.1 | length 4455.9
  Top Layer w10: v1(218.97,415.81) 218.97,403.69 343.97,278.69 v1(343.97,90.81) ; v1(228.97,1865.81) 332.58,1969.42 332.58,2148.34 389.44,2239.33 901.26,2357.49 938.84,2366.17 U2.1 ; U1.22 318.04,-45.12 v1(343.97,-19.19)
  Bottom Layer w10: P2.13 -926.03,540.81 -874.03,488.81 151.98,488.81 v1@218.97,421.82 ; v1(218.97,415.81) v1@218.97,421.82 ; v1(228.97,1865.81) 227.97,1866.81 227.97,913.8 218.97,904.8 v1@218.97,421.82 ; v1(343.97,-19.19) v1(343.97,90.81)
PE2: P3.15 U1.33 | length 2886.9
  Top Layer w10: v1(-16.03,330.39) U1.33 ; v1(993.97,760.81) 1022.5,789.34 1121.37,789.34 1132.5,778.21 1132.5,-610.66 P3.15
  Bottom Layer w10: v1(-16.03,330.39) 24.39,370.81 603.97,370.81 v1(993.97,760.81)
PE6: P3.14 U1.1 | length 1940.7
  Top Layer w10: v1(-376.03,-349.19) -376.03,-151.48 U1.1
  Bottom Layer w10: v1(-376.03,-349.19) -166.03,-559.19 -61.03,-559.19 -6.03,-614.19 178.97,-614.19 233.97,-559.19 P3.14
Q0: R1.1 U3.15 | length 459.9
  Top Layer w10: U3.15 -491.03,-1491.18 -410.22,-1410.37 -410.22,-1327.28 R1.1
Q1: R3.1 U3.1 | length 194.2
  Top Layer w10: U3.1 -441.03,-1289.19 -373.17,-1221.33 R3.1
Q2: R5.1 U3.2 | length 174.7
  Top Layer w10: U3.2 -491.03,-1274.19 -470.31,-1253.48 R5.1
Q3: R7.1 U3.3 | length 177
  Top Layer w10: R7.1 -567.46,-1242.76 -541.03,-1269.19 U3.3
Q4: R8.1 U3.4 | length 196.6
  Top Layer w10: R8.1 -591.03,-1266.66 U3.4
Q5: R9.1 U3.5 | length 216.1
  Top Layer w10: R9.1 -641.03,-1313.8 U3.5
Q6: R10.1 U3.6 | length 271.8
  Top Layer w10: R10.1 -779.09,-1272.88 -717.34,-1272.88 -691.03,-1299.19 U3.6
Q7: R11.1 U3.7 | length 316
  Top Layer w10: R11.1 -852.23,-1296.88 -748.34,-1296.88 -741.03,-1304.19 U3.7
Q8: R12.1 U4.15 | length 477.4
  Top Layer w10: R12.1 -331.03,1335.81 -206.84,1460 -206.84,1508.68 -126.03,1589.49 U4.15
Q9: R13.1 U4.1 | length 212.6
  Top Layer w10: R13.1 -236.03,1340.81 -176.03,1400.81 U4.1
Q10: R14.1 U4.2 | length 194
  Top Layer w10: R14.1 -141.03,1375.81 -126.03,1390.81 U4.2
Q11: R15.1 U4.3 | length 200.2
  Top Layer w10: U4.3 -76.03,1380.81 -46.03,1350.81 R15.1
Q12: pad.0 R16.1 U4.4 | length 218.9
  Top Layer w10: U4.4 -26.03,1395.81 48.97,1320.81 R16.1
Q13: R17.1 U4.5 | length 237.5
  Top Layer w10: U4.5 23.97,1400.81 143.97,1280.81 R17.1
Q14: R18.1 U4.6 | length 276
  Top Layer w10: U4.6 73.97,1400.81 132.97,1341.81 166.87,1341.81 R18.1
Q15: R19.1 U4.7 | length 321
  Top Layer w10: U4.7 123.97,1400.81 158.97,1365.81 237.87,1365.81 R19.1
RESET: SW1.1 SW1.2 U1.13 | length 1344.2
  Top Layer w10: U1.13 69.54,-245.56 93.8,-269.82 133.34,-269.82 v1(138.97,-264.19) ; v1(203.97,-374.19) 203.97,-539.19 183.97,-559.19 183.97,-609.19 273.97,-699.19 363.97,-699.19 v1(493.97,-829.19) ; v1(590.94,-926.16) 670.39,-1005.61 SW1.2
  Bottom Layer w10: v1(138.97,-264.19) 93.97,-309.19 93.97,-349.19 116.97,-372.19 201.97,-372.19 v1(203.97,-374.19) ; v1(493.97,-829.19) v1(590.94,-926.16)
RST: P1.3
SCK: P1.2 P3.12 U1.9 U2.3 U3.11 U4.11 | length 7437.3
  Top Layer w10: U3.11 -691.03,-1626.1 -618.91,-1698.22 -352.22,-1698.22 -51.03,-1397.03 v1(-51.03,-1094.19) ; U1.9 -164.06,-295.85 -164.06,-327.22 -43.09,-448.19 92.97,-448.19 v1(93.97,-449.19) ; v1(-63.53,-911.69) -71.03,-904.19 -71.03,-769.19 128.97,-569.19 v1(133.97,-569.19) ; U4.11 73.97,1700.81 97.7,1724.53 283.88,1724.53 327.6,1680.81 ; v1(771.44,813.34) 477.97,1106.81 477.97,1275.75 428.97,1324.75 P1.2 377.5,1562.28 377.5,1630.91 327.6,1680.81 ; U2.3 943.96,2316.55 905.51,2307.67 462.58,2205.42 400.43,2105.94 400.43,1753.64 327.6,1680.81
  Bottom Layer w10: v1(-63.53,-911.69) -63.53,-1081.69 v1(-51.03,-1094.19) ; 93.97,-464.19 v1(93.97,-449.19) ; v1(133.97,-569.19) 138.97,-569.19 93.97,-524.19 v1(93.97,-449.19) ; v1(771.44,813.34) 1097.37,813.34 1132.5,778.21 1132.5,-310.66 P3.12 982.97,-460.19 168.91,-460.19 153.91,-445.19 97.97,-445.19 v1(93.97,-449.19)
SS: P3.13 U1.8 U2.2 U3.12 U4.12 | length 7241.5
  Top Layer w10: U3.12 -641.03,-1599.19 -566,-1674.22 -362.17,-1674.22 -101.03,-1413.09 v1(-101.03,-1094.19) ; U1.8 -191.03,-278.27 -191.03,-334.19 -47.03,-478.19 124.97,-478.19 v1(128.97,-474.19) v1(128.97,-329.19) ; v1(-101.03,-924.19) -101.03,-763.18 132.96,-529.19 v1(158.97,-529.19) ; U4.12 23.97,1695.81 83.97,1755.81 v1(198.97,1755.81) 366.5,1923.34 366.5,2127.14 426.01,2222.37 941.4,2341.36 U2.2 ; v1(198.97,925.81) 198.97,480.81 383.97,295.81 v1(383.97,120.81)
  Bottom Layer w10: v1(-101.03,-1094.19) v1(-101.03,-924.19) ; v1(128.97,-329.19) 214.02,-329.19 227.02,-342.19 270.92,-342.19 275.92,-337.19 295.96,-337.19 306.96,-348.19 330.98,-348.19 383.97,-295.2 v1(383.97,120.81) ; v1(158.97,-529.19) 128.97,-499.19 v1(128.97,-474.19) 148.97,-474.19 158.97,-484.19 992.91,-484.19 1017.91,-459.19 P3.13 ; v1(198.97,925.81) v1(198.97,1755.81)
USB: C2.2 C3.1 R2.2 U1.2 U1.7 U5.2 U5.4 U5.7 U5.8 USBMicroB1.1 | length 3996.6
  Top Layer w10: U1.2 -246.22,-68.58 -246.22,-63.85 -225.5,-43.14 -196.07,-43.14 -111.79,-127.42 -111.79,-156.85 -132.51,-177.57 -137.23,-177.57 U1.7 -136.05,-181.11 -215.03,-260.09 -215.03,-555.19 -151.03,-619.19 v1(-131.03,-619.19) ; 23.97,-1654.19 23.97,-1624.19 43.97,-1604.19 433.97,-1604.19 468.97,-1569.19 468.97,-1514.19 v1(356.85,-1402.07)
  Top Layer w20: C3.1 -651.03,-1853.95 -651.03,-1784.19 -606.03,-1739.19 -417.88,-1739.19 C2.2 -151.03,-1854.19 ; U5.2 -26.03,-1704.19 ; USBMicroB1.1@-53.49,-1964.19 -66.52,-1951.17 -66.52,-1903.7 -71.03,-1899.19 -106.03,-1899.19 -151.03,-1854.19 ; U5.7 33.97,-1704.19 3.97,-1674.19 ; U5.8 23.97,-1654.19 3.97,-1674.19 ; -151.03,-1854.19 U5.4 -36.03,-1804.19 -11.03,-1779.19 -11.03,-1719.19 -26.03,-1704.19 ; -26.03,-1704.19 3.97,-1674.19
  Bottom Layer w10: v1(-131.03,-619.19) 333.97,-1084.19 333.97,-1379.19 v1(356.85,-1402.07)
VCC: C1.2 C4.1 P1.4 P2.1 P3.16 U1.14 U1.24 U1.34 U1.44 U3.10 U3.16 U4.10 U4.16 U5.1 U5.5 U5.6 U6.3 | length 1100.3
  Top Layer w10: v1(-741.03,-1644.19) U3.10 ; U3.16 v1(-396.3,-1563.91) ; C1.2@-308.81,-1935.73 -302.88,-1935.73 C1.2 ; v1(-222.45,1615.81) U4.16 ; v1(123.97,1570.81) U4.10
  Top Layer w14: v1(992.05,1500.81) U6.3
  Top Layer w20: C4.1 -480.79,-2024.19 -426.03,-2024.19 ; v1(-426.03,-2044.19) -426.03,-2024.19 ; C1.2 -362.88,-2024.19 -426.03,-2024.19 ; v1(-176.03,-1654.19) U5.1 ; U5.5 U5.6 v1(178.97,-1754.19)
VDD_PA: C8.2 C9.2 L3.2 U2.11 | length 186.3
  Top Layer w10: U2.11@1092.02,2172.52 1096.81,2151.77
  Top Layer w14: 1096.81,2151.77 1111.88,2142.35 1118.14,2115.23 L3.2
pads on no net: C5.2 U4.9 USBMicroB1.4 USBMicroB1.CASE
copper on no net: | length 37389.1
  Top Layer w0.5: -1980,1025.73 -2397.26,1693.48 cw(c-2263.71,1776.93) -2347.16,1910.48 -1125,2674.17 cw(c-1041.55,2540.62) -963.24,2677.25 -188.25,2233.03 cw(c-266.57,2096.4) -168,2219.22 ccw(c0.57,2488.23) 169.31,2219.32 cw(c267.83,2096.47) 189.39,2233.03 964.74,2677.04 cw(c1043.04,2540.41) 1126.14,2674.17 2038.18,2104.27 1454.01,1169.41 1229.93,1309.43 ccw(c1146.48,1175.88) 1181.67,1329.38 1181.67,-1736.71 787.97,-2130.41 -786.83,-2130.41 -1180.53,-1736.71 -1180.53,1329.38 ccw(c-1145.34,1175.88) -1228.79,1309.43 -1763,975.63 cw(c-1846.45,1109.18) -1980,1025.73
  Top Layer w3.94: 1850.82,1849.74 1907.37,1814.4
  Bottom Layer w0.01: 193.07,1965.45 cw(c326.87,2098.12) 194.21,2231.92
  Bottom Layer w0.5: 194.21,2231.92 969.56,2675.94 cw(c1047.86,2539.3) 1130.96,2673.07 2043,2103.16 1458.83,1168.31 ; -2386.23,1692.67 cw(c-2252.68,1776.12) -2336.13,1909.67 -1113.97,2673.36 cw(c-1030.52,2539.81) -952.21,2676.44 -177.22,2232.22 cw(c-255.54,2095.59) -156.97,2218.41 ccw(c11.6,2487.42) 102.47,2183.24 ccw(c278.73,2095.59) 174.42,1928.65 1192.7,1292.36 1192.7,-1737.52 799,-2131.22 -775.8,-2131.22 -1169.51,-1737.52 -1169.51,1328.57 ccw(c-1134.31,1175.07) -1217.77,1308.62 -1751.97,974.82 cw(c-1835.42,1108.37) -1968.97,1024.92 -2386.23,1692.67
  Bottom Layer w3.94: 193.07,1965.45 1461.63,1172.77
  other v2: 1.29,1930.81

## Polygon pours and split planes (outlines as drawn)
VCC on Bottom Layer "Top Layer-No Net" (solid, pour order 23): -1968.28,1023.94 ccw(c-1834.73,1107.4) -1751.27,973.84 -1217.07,1307.65 cw(c-1133.62,1174.1) -1168.81,1327.6 -1168.81,-1738.49 -775.11,-2132.19 799.7,-2132.19 1193.4,-1738.49 1193.4,1291.38 175.11,1927.68 cw(c279.43,2094.62) 103.17,2182.27 cw(c12.29,2486.45) -156.27,2217.44 ccw(c-254.84,2094.62) -176.53,2231.24 -951.51,2675.47 ccw(c-1029.83,2538.84) -1113.28,2672.39 -2335.44,1908.7 ccw(c-2251.99,1775.15) -2385.54,1691.7
3V3 on Bottom Layer "Top Layer-No Net" (solid, pour order 5): 186.61,1970.11 cw(c321.81,2101.38) 188.95,2235.01 cw(c189.15,2235.18) 189.02,2235.41 964.36,2679.42 964.37,2679.43 cw(c1042.8,2542.56) 1126.04,2676.55 cw(c1125.9,2676.33) 1126.05,2676.55 2038.08,2106.65 cw(c2037.94,2106.42) 2038.16,2106.28 1457.83,1177.56 cw(c1456.57,1176.03) 1458.25,1174.98 cw(c1456.57,1176.03) 1455.75,1174.23 1454,1171.43 cw(c1453.77,1171.57) 1453.55,1171.71 1455.29,1174.49 186.96,1967.03 cw(c188.01,1968.71)
GND on Top Layer "Top Layer-No Net" (solid, pour order 21): -1980,1025.73 ccw(c-1846.45,1109.18) -1763,975.63 -1228.79,1309.43 cw(c-1145.34,1175.88) -1180.53,1329.38 -1180.53,-1736.71 -786.83,-2130.41 787.97,-2130.41 1181.67,-1736.71 1181.67,1329.38 cw(c1146.48,1175.88) 1229.93,1309.43 1454.01,1169.41 2038.18,2104.27 1126.14,2674.17 ccw(c1043.04,2540.41) 964.74,2677.04 189.39,2233.03 ccw(c267.83,2096.47) 169.31,2219.32 cw(c0.57,2488.23) -168,2219.22 ccw(c-266.56,2096.4) -188.25,2233.03 -963.24,2677.25 ccw(c-1041.55,2540.62) -1125,2674.17 -2347.16,1910.48 ccw(c-2263.71,1776.93) -2397.26,1693.48

## Silkscreen, mask and mechanical layers (free items; w line width, h text height)
Top Overlay:
  drawing of 60 lines, arcs and shapes, not listed

## Text inside footprints (layer, text, board x,y; h text height)
C3: Top Overlay "+" at -839.53,-2042.46 h49.21
C4: Top Overlay "+" at -649.53,-2042.46 h49.21
P1: Top Overlay "6" at 608.97,1590.81 h49.21; Top Overlay "3" at 608.97,1490.81 h49.21; Top Overlay "1" at 248.97,1490.81 h49.21; Top Overlay "4" at 228.97,1590.81 h49.21